# EAGLE board chargerboardrev2 (EAGLE 9.4.2)
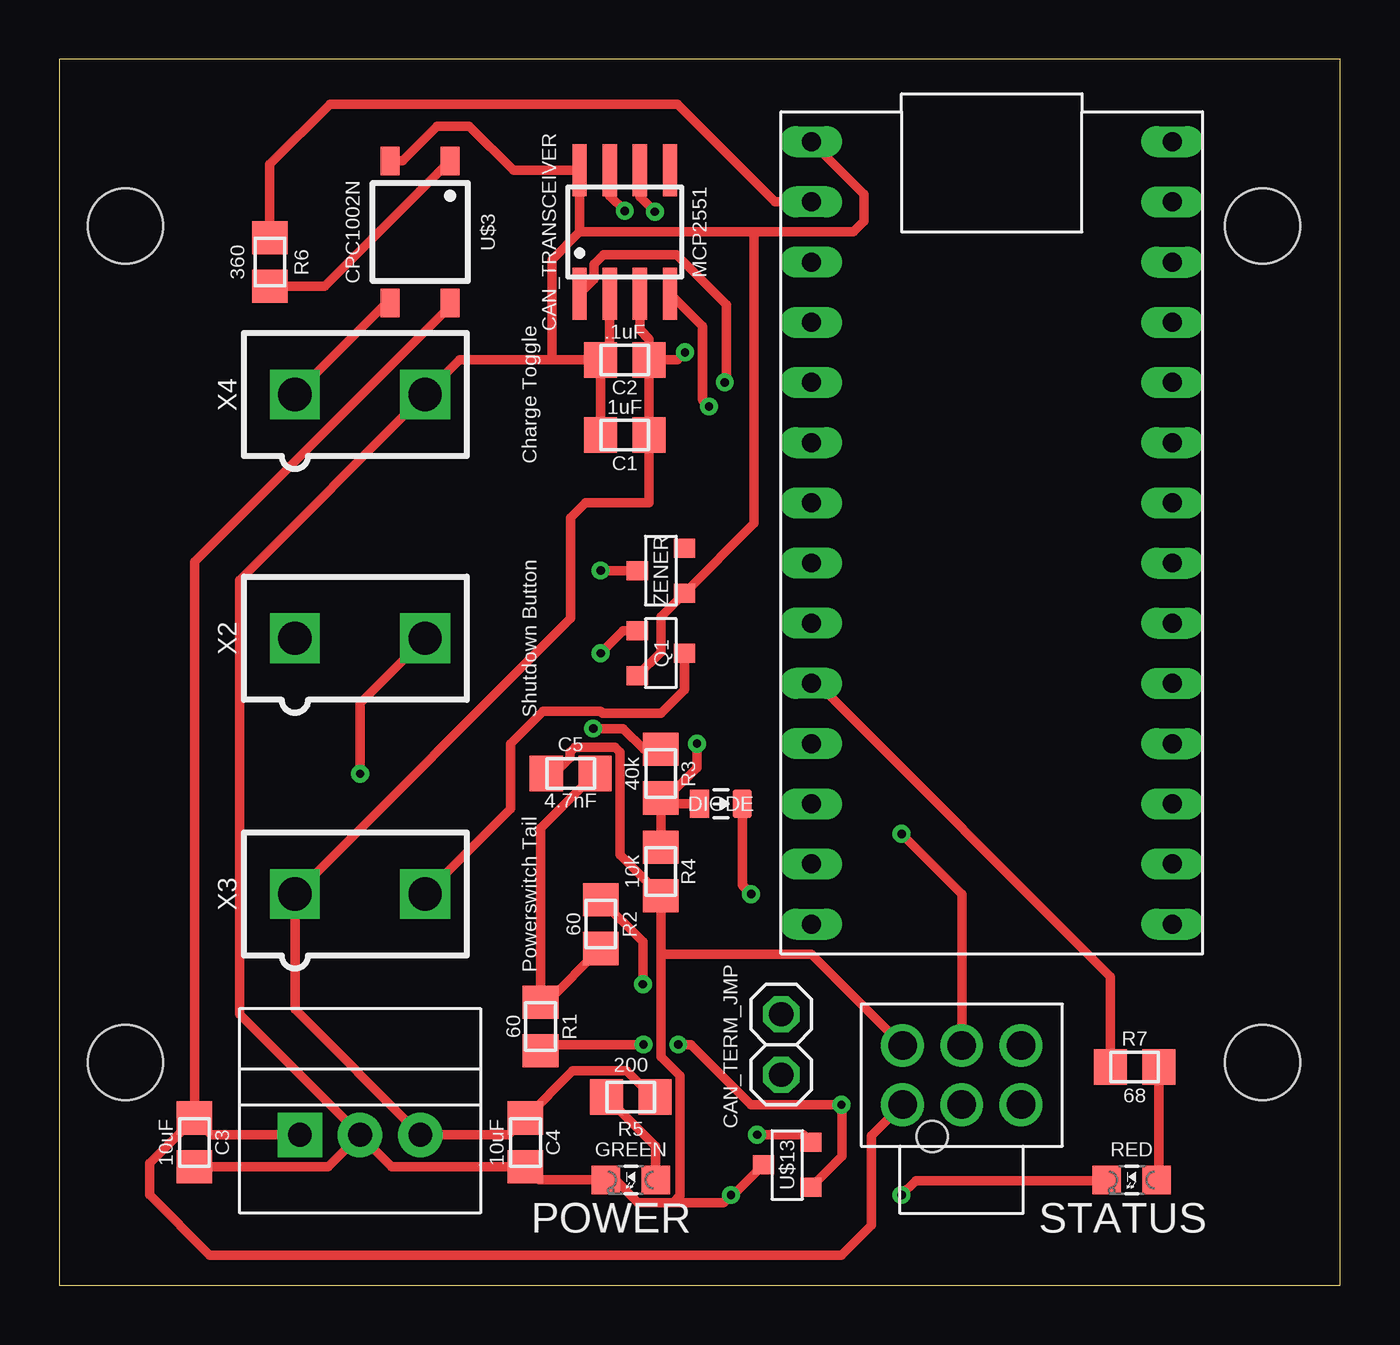
[diagram p0: board, top side]
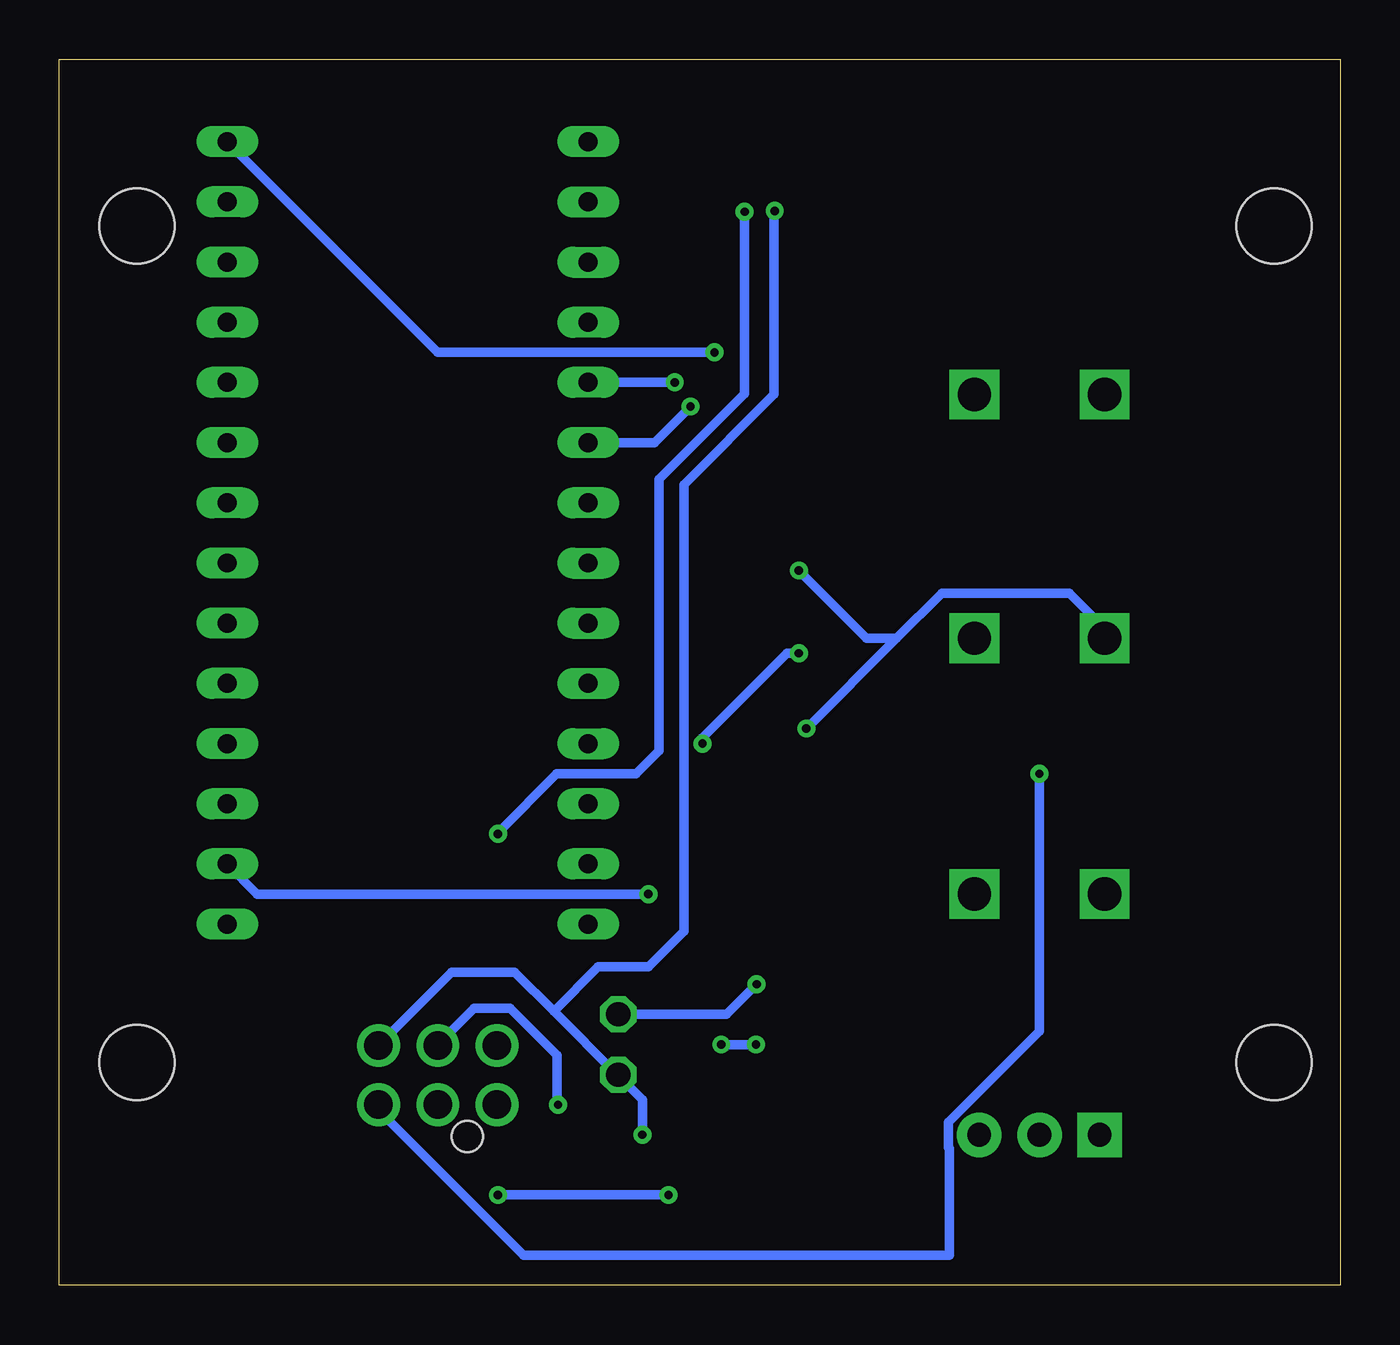
[diagram p1: board, bottom side, seen from below]

Size 54.08 x 51.74 mm. Coordinates in mm from the lower left corner, seen from the top.
Outline: 0,0 54.08,0 54.08,51.74 0,51.74 0,0
Copper layers (1+2*15+16): Top 0.035mm / dielectric 0.18mm / Route2 0.017mm / dielectric 1.12mm / Route15 0.017mm / dielectric 0.18mm / Bottom 0.035mm
Design rules "DRC JLC 4-layer": minimum track width 6mil, minimum drill 10mil, track to track 6mil, track to pad 6mil, pad to pad 6mil, via to via 6mil, smd to smd 6mil, copper to edge 40mil, drill to drill 6mil, minimum pad ring 10mil, minimum via ring 8mil, stop-mask expansion 4mil, vias tented up to drill 0mil, thermal gap 10mil
Holes 3.17 mm at 2.79,44.7 2.79,9.4 50.8,9.4 50.8,44.7

## Footprints (pad centres in the part's own frame; a part is rotated, then mirrored left to right if it is on the bottom)
0805 = smd 1.4 x 1.5: 1 -1.025,0; 2 1.025,0
1X02_SLIM = drill 1.016 octagon: 1 -1.27,0; 2 1.27,0
SOIC-08 = smd 0.6 x 2.2: 1 -1.905,-2.6; 2 -0.635,-2.6; 3 0.635,-2.6; 4 1.905,-2.6; 5 1.905,2.6; 6 0.635,2.6; 7 -0.635,2.6; 8 -1.905,2.6
0805_D = smd 0.8 x 1.2: A -0.9,0; C 0.9,0
LED-805 = smd 1.2 x 1.2: A 0,-1.05; C 0,1.05
SOT23 = smd 0.8 x 0.9: 1 -0.95,-1; 2 0.95,-1; 3 0,1
OKI-78SR = drill 1 pad 1.88 square: 1 -2.54,0 | drill 1 pad 1.88: 2 0,0; 3 2.54,0
SOP04 = smd 0.8 x 1.2: 1 -1.27,-3; 2 1.27,-3; 3 1.27,3; 4 -1.27,3
TEENSY_3.2_SIMPLE = drill 0.8 long: 3.3V 16.51,29.21; A0 16.51,3.81; A1 16.51,6.35; A2 16.51,8.89; A3 16.51,11.43; A4 16.51,13.97; A5 16.51,16.51; A6 16.51,19.05; A7 16.51,21.59; A8 16.51,24.13; A9 16.51,26.67; AGND 16.51,31.75; D0(RX1) 1.27,31.75; D1(TX1) 1.27,29.21; D2 1.27,26.67; D3(CANTX) 1.27,24.13; D4(CANRX) 1.27,21.59; D5 1.27,19.05; D6 1.27,16.51; D7(RX3) 1.27,13.97; D8(TX3) 1.27,11.43; D9(RX2) 1.27,8.89; D10(TX2) 1.27,6.35; D11 1.27,3.81; D12 1.27,1.27; D13 16.51,1.27; GND 1.27,34.29; VIN 16.51,34.29
NANO-FIT_VERTICAL-6 = drill 1.2: P$1 -2.5,0; P$2 0,0; P$3 2.5,0; P$4 -2.5,2.5; P$5 0,2.5; P$6 2.5,2.5 | hole 1.3: -1.25,-1.34
MINIFIT_5566-2 = drill 1.4 square: 1 0,-2.75; 2 0,2.75

## Placement (x,y rotation side)
C1  1uF  [0805]  23.88,35.88 0 top
C2  .1uF  [0805]  23.88,39.05 0 top
C3  10uF  [0805]  5.72,6.03 90 top
C4  10uF  [0805]  19.69,6.03 90 top
C5  4.7nF  [0805]  21.59,21.59 180 top
CAN_TERM_JMP  M02_SLIM  [1X02_SLIM]  30.48,10.16 90 top
CAN_TRANSCEIVER  MCP2551  [SOIC-08]  23.88,44.45 0 top
DIODE  DIODE  [0805_D]  27.94,20.32 0 top
POWER  GREEN  [LED-805]  24.13,4.45 90 top
Q1  [SOT23]  25.4,26.67 270 top
R1  60  [0805]  20.32,10.92 90 top
R2  60  [0805]  22.86,15.24 90 top
R3  40k  [0805]  25.4,21.59 90 top
R4  10k  [0805]  25.4,17.46 90 top
R5  200  [0805]  24.13,7.94 180 top
R6  360  [0805]  8.89,43.18 270 top
R7  68  [0805]  45.4,9.21 180 top
REG  5V  [OKI-78SR]  12.7,6.35 0 top
STATUS  RED  [LED-805]  45.28,4.45 90 top
U$3  CPC1002N  [SOP04]  15.24,44.45 180 top
U$4  TEENSY_3.2_SIMPLE  [TEENSY_3.2_SIMPLE]  30.48,13.97 0 top
U$13  CDSOT23-T24CAN-Q  [SOT23]  30.73,5.08 90 top
X1  Car Connector  [NANO-FIT_VERTICAL-6]  38.1,7.62 0 top
X2  Shutdown Button  [MINIFIT_5566-2]  12.7,27.3 270 top
X3  Powerswitch Tail  [MINIFIT_5566-2]  12.7,16.51 270 top
X4  Charge Toggle  [MINIFIT_5566-2]  12.7,37.59 270 top
ZENER  [SOT23]  25.4,30.16 90 top

## Library data of the parts
C1-C5 CAN_TERM_JMP CAN_TRANSCEIVER DIODE POWER Q1 R1-R7 REG STATUS U$3 U$4 U$13 X1 ZENER = HyTechDevices
X2-X4 = HyTechDevices; OC_FARNELL: 1822072; OC_NEWARK: unknown

## Nets
+5V: C1.2 C2.2 C4.2 CAN_TRANSCEIVER.3 R5.1 REG.3 U$4.VIN X3.1
+12V: C3.2 REG.1 U$3.4 X1.P$1
CANH: CAN_TERM_JMP.1 CAN_TRANSCEIVER.7 U$13.2 X1.P$6
CANL: CAN_TRANSCEIVER.6 R1.1 U$13.1 X1.P$5
CHARGER_ON: DIODE.A Q1.1 R3.1 R4.2
GND: C1.1 C2.1 C3.1 C4.1 C5.2 CAN_TRANSCEIVER.2 CAN_TRANSCEIVER.8 POWER.C Q1.2 R4.1 REG.2 STATUS.C U$3.2 U$4.GND U$13.3 X1.P$4 X4.2 ZENER.1
N$1: Q1.3 X3.2
N$7: U$3.3 X4.1
N$8: R7.1 STATUS.A
N$9: POWER.A R5.2
N$10: R6.2 U$3.1
N$11: R7.2 U$4.D8(TX3)
N$15: CAN_TRANSCEIVER.4 U$4.D4(CANRX)
N$17: CAN_TERM_JMP.2 R2.2
N$22: CAN_TRANSCEIVER.1 U$4.D3(CANTX)
N$62: C5.1 R1.2 R2.1
PRE_BRB_SHUTDOWN_CIRCUIT: X1.P$3 X2.2
PRE_DIODE_CHARGER_ON: DIODE.C U$4.A0
SHUTDOWN_CIRCUIT: R3.2 X2.1 ZENER.3
TOGGLE_CHARGER: R6.1 U$4.D0(RX1)

## Tracks (layer width: path | path; a pad name or v marks a point on that pad's centre or on a via)
+5V  (via drill 0.35)
  Top 0.406: R5.1 25.06,7.94 23.95,9.04 21.67,9.04 C4.2 18.98,6.35 REG.3 9.95,11.64 X3.1 21.59,28.15 21.59,32.38 22.22,33.02 24.9,33.02 C1.2 C2.2 | C2.2 24.9,39.93 24.51,40.32 CAN_TRANSCEIVER.3 | v26.42,39.37 26.1,39.05 C2.2
  Bottom 0.406: U$4.VIN 38.1,39.37 v26.42,39.37
+12V
  Top 0.406: REG.1 6.42,6.35 C3.2 | U$3.4 16.51,41.32 5.72,30.53 C3.2 | X1.P$1 34.29,6.31 34.29,2.54 33.02,1.27 6.35,1.27 3.81,3.81 3.81,5.15 C3.2
CANH  (via drill 0.35)
  Top 0.406: v23.88,45.34 23.24,45.97 CAN_TRANSCEIVER.7 | U$13.2 31.41,6.35 v29.46,6.35
  Bottom 0.406: v23.88,45.34 23.9,45.31 23.9,37.59 27.71,33.78 27.71,14.93 29.21,13.43 31.33,13.43 33.2,11.56 | X1.P$6 37.52,13.2 34.85,13.2 33.2,11.56 | CAN_TERM_JMP.1 30.53,8.89 | v29.46,6.35 29.46,7.82 30.53,8.89 | 30.53,8.89 33.2,11.56
CANL  (via drill 0.35)
  Top 0.406: CAN_TRANSCEIVER.6 24.51,45.94 v25.15,45.3 | X1.P$5 38.1,16.51 v35.56,19.05 | U$13.1 33.05,5.44 33.05,7.59 v33.02,7.62 29.21,7.62 26.67,10.16 v26.13,10.16 | R1.1 20.32,10.16 v24.67,10.16
  Bottom 0.406: v25.15,45.3 25.15,37.62 28.75,34.01 28.75,22.55 29.72,21.58 33.08,21.58 35.56,19.1 v35.56,19.05 | v33.02,7.62 33.07,7.67 33.07,9.71 35.05,11.68 36.58,11.68 38.1,10.16 X1.P$5 | v24.67,10.16 v26.13,10.16
CHARGER_ON  (via drill 0.35)
  Top 0.406: R4.2 R3.1 | Q1.1 23.81,27.62 v22.86,26.67 | R3.1 25.65,20.57 26.92,21.84 v26.92,22.86 | DIODE.A 25.65,20.32 R3.1
  Bottom 0.406: v22.86,26.67 23.37,26.67 26.92,23.11 v26.92,22.86
GND  (via drill 0.35)
  Top 0.406: U$4.GND 33.97,46.04 33.97,44.89 33.53,44.45 29.34,44.45 | 29.34,44.45 21.97,44.45 | 21.97,44.45 CAN_TRANSCEIVER.8 19.18,47.05 17.31,48.91 15.96,48.91 14.5,47.45 U$3.2 | REG.2 11.36,5.01 C3.1 | REG.2 14.04,5.01 C4.1 20.25,4.45 POWER.C 23.48,4.45 24.43,3.49 25.93,3.49 | 20.81,39.05 16.91,39.05 X4.2 7.62,29.76 7.62,11.43 REG.2 | C2.1 23.24,39.44 CAN_TRANSCEIVER.2 | C2.1 C1.1 | Q1.2 25.4,26.72 25.4,28.21 ZENER.1 29.34,32.15 29.34,44.45 | 25.4,13.97 25.4,9.64 26.21,8.84 26.21,3.77 25.93,3.49 | 25.4,13.97 R4.1 23.67,18.17 23.67,22.49 23.46,22.7 21.77,22.7 21.56,22.49 21.56,22.27 20.56,21.27 C5.2 | 25.4,13.97 31.75,13.97 X1.P$4 | STATUS.C 44.06,4.41 36.16,4.41 v35.56,3.81 | 25.93,3.49 28.04,3.49 v28.36,3.81 28.46,3.81 U$13.3 | 20.81,39.05 20.81,43.29 21.97,44.45 | C2.1 20.81,39.05
  Bottom 0.406: v35.56,3.81 v28.36,3.81
N$1
  Top 0.406: X3.2 19.05,20.11 19.05,22.86 20.42,24.23 22.85,24.23 22.94,24.13 25.4,24.13 26.4,25.13 Q1.3
N$7
  Top 0.406: X4.1 13.81,41.45 U$3.3
N$8
  Top 0.406: R7.1 46.43,4.67 STATUS.A
N$9
  Top 0.406: R5.2 25.18,5.86 POWER.A
N$10
  Top 0.406: U$3.1 11.22,42.15 R6.2
N$11
  Top 0.406: U$4.D8(TX3) 32,25.4 44.38,13.03 R7.2
N$15  (via drill 0.35)
  Top 0.406: v27.43,37.08 27.15,37.37 27.15,40.48 CAN_TRANSCEIVER.4
  Bottom 0.406: U$4.D4(CANRX) 28.96,35.56 v27.43,37.08
N$17  (via drill 0.35)
  Top 0.406: R2.2 24.64,14.49 v24.64,12.7
  Bottom 0.406: v24.64,12.7 25.91,11.43 CAN_TERM_JMP.2
N$22  (via drill 0.35)
  Top 0.406: CAN_TRANSCEIVER.1 22.59,42.46 22.59,43.1 22.97,43.48 26.05,43.48 28.16,41.37 28.16,38.17 v28.09,38.1
  Bottom 0.406: U$4.D3(CANTX) v28.09,38.1
N$62
  Top 0.406: C5.1 20.32,19.3 R1.2 20.59,11.95 R2.1
PRE_BRB_SHUTDOWN_CIRCUIT  (via drill 0.35)
  Top 0.406: v12.7,21.59 12.7,24.55 X2.2
  Bottom 0.406: v12.7,21.59 12.7,10.72 16.53,6.89 16.53,5.81 16.51,5.79 16.51,1.27 34.48,1.27 40.6,7.39 X1.P$3
PRE_DIODE_CHARGER_ON  (via drill 0.35)
  Top 0.406: v29.21,16.51 28.84,16.88 DIODE.C
  Bottom 0.406: v29.21,16.51 45.72,16.51 U$4.A0
SHUTDOWN_CIRCUIT  (via drill 0.35)
  Top 0.406: ZENER.3 v22.86,30.16 | v22.54,23.5 23.81,23.5 24.69,22.61 R3.2
  Bottom 0.406: v22.86,30.16 20,27.3 18.73,27.3 | v22.54,23.5 18.73,27.3 | 18.73,27.3 16.83,29.21 11.43,29.21 9.95,27.73 X2.1
TOGGLE_CHARGER
  Top 0.406: U$4.D0(RX1) 30.23,45.72 26.1,49.85 11.43,49.85 8.89,47.31 R6.1

## Text on the board
tDocu: TOGGLE / CHARGER | Designed by: / Dean Plaskon / Arvind Srinivasan | SHUTDOWN / BUTTON | CHARGER / POWER | HyTech Racing 2020 Charger Board Rev2